# Altium PCB 前瞻传感器.PcbDoc
Units mil, origin at the board's own origin, x right, y up, seen from the top; angles counter-clockwise.
Board outline 3937.01 x 3937.01 mil, 4 copper layers (Top, GND, PWR, Bottom), stack 23.754 mil thick; 19 components, 34 nets, 122 pads, 48 vias.
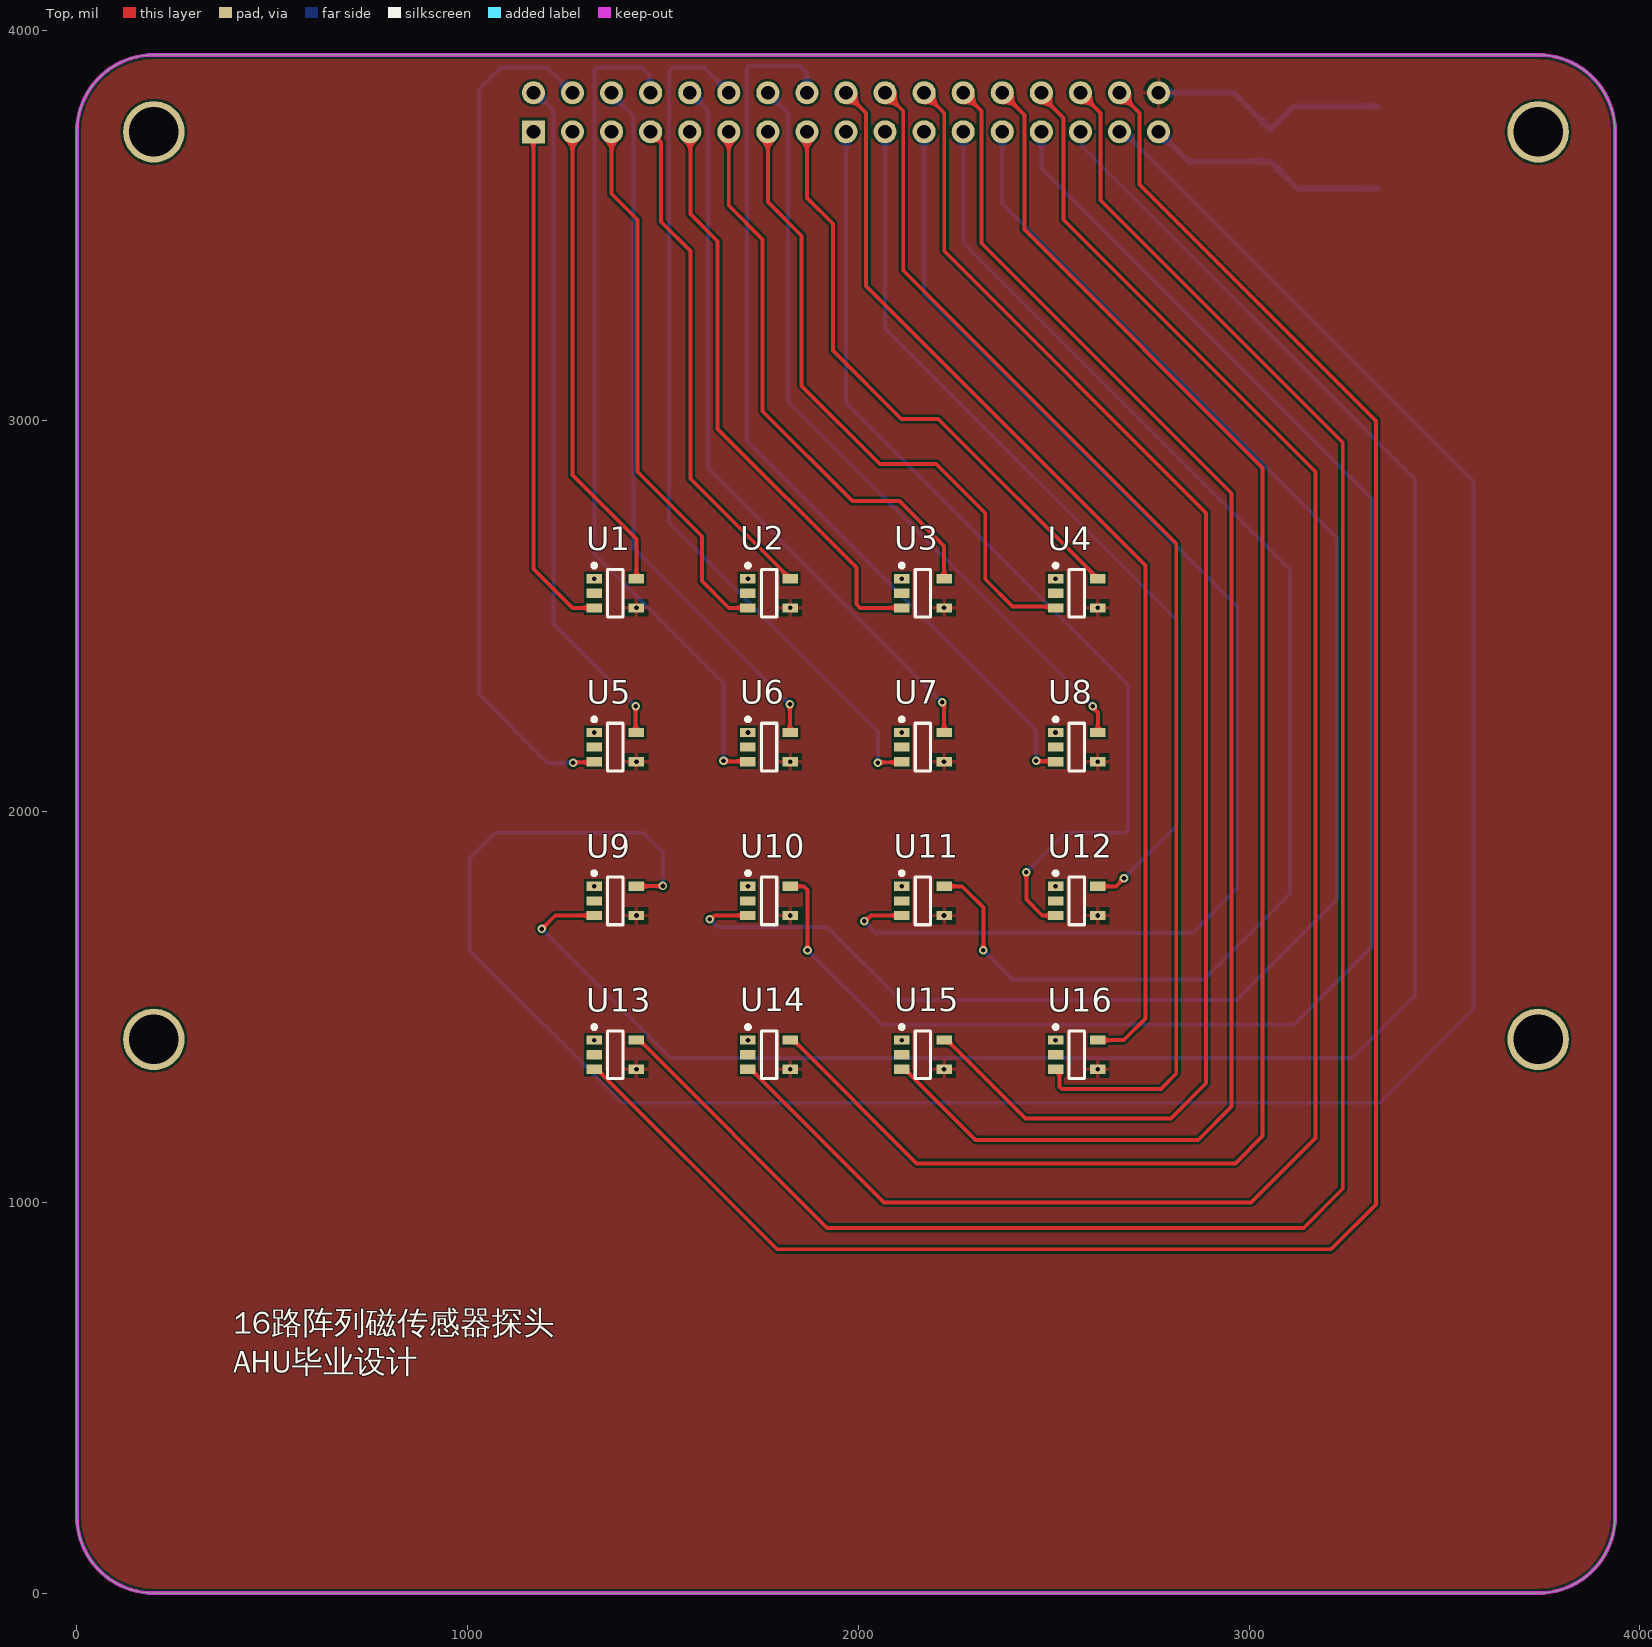
[diagram p0: Top view]
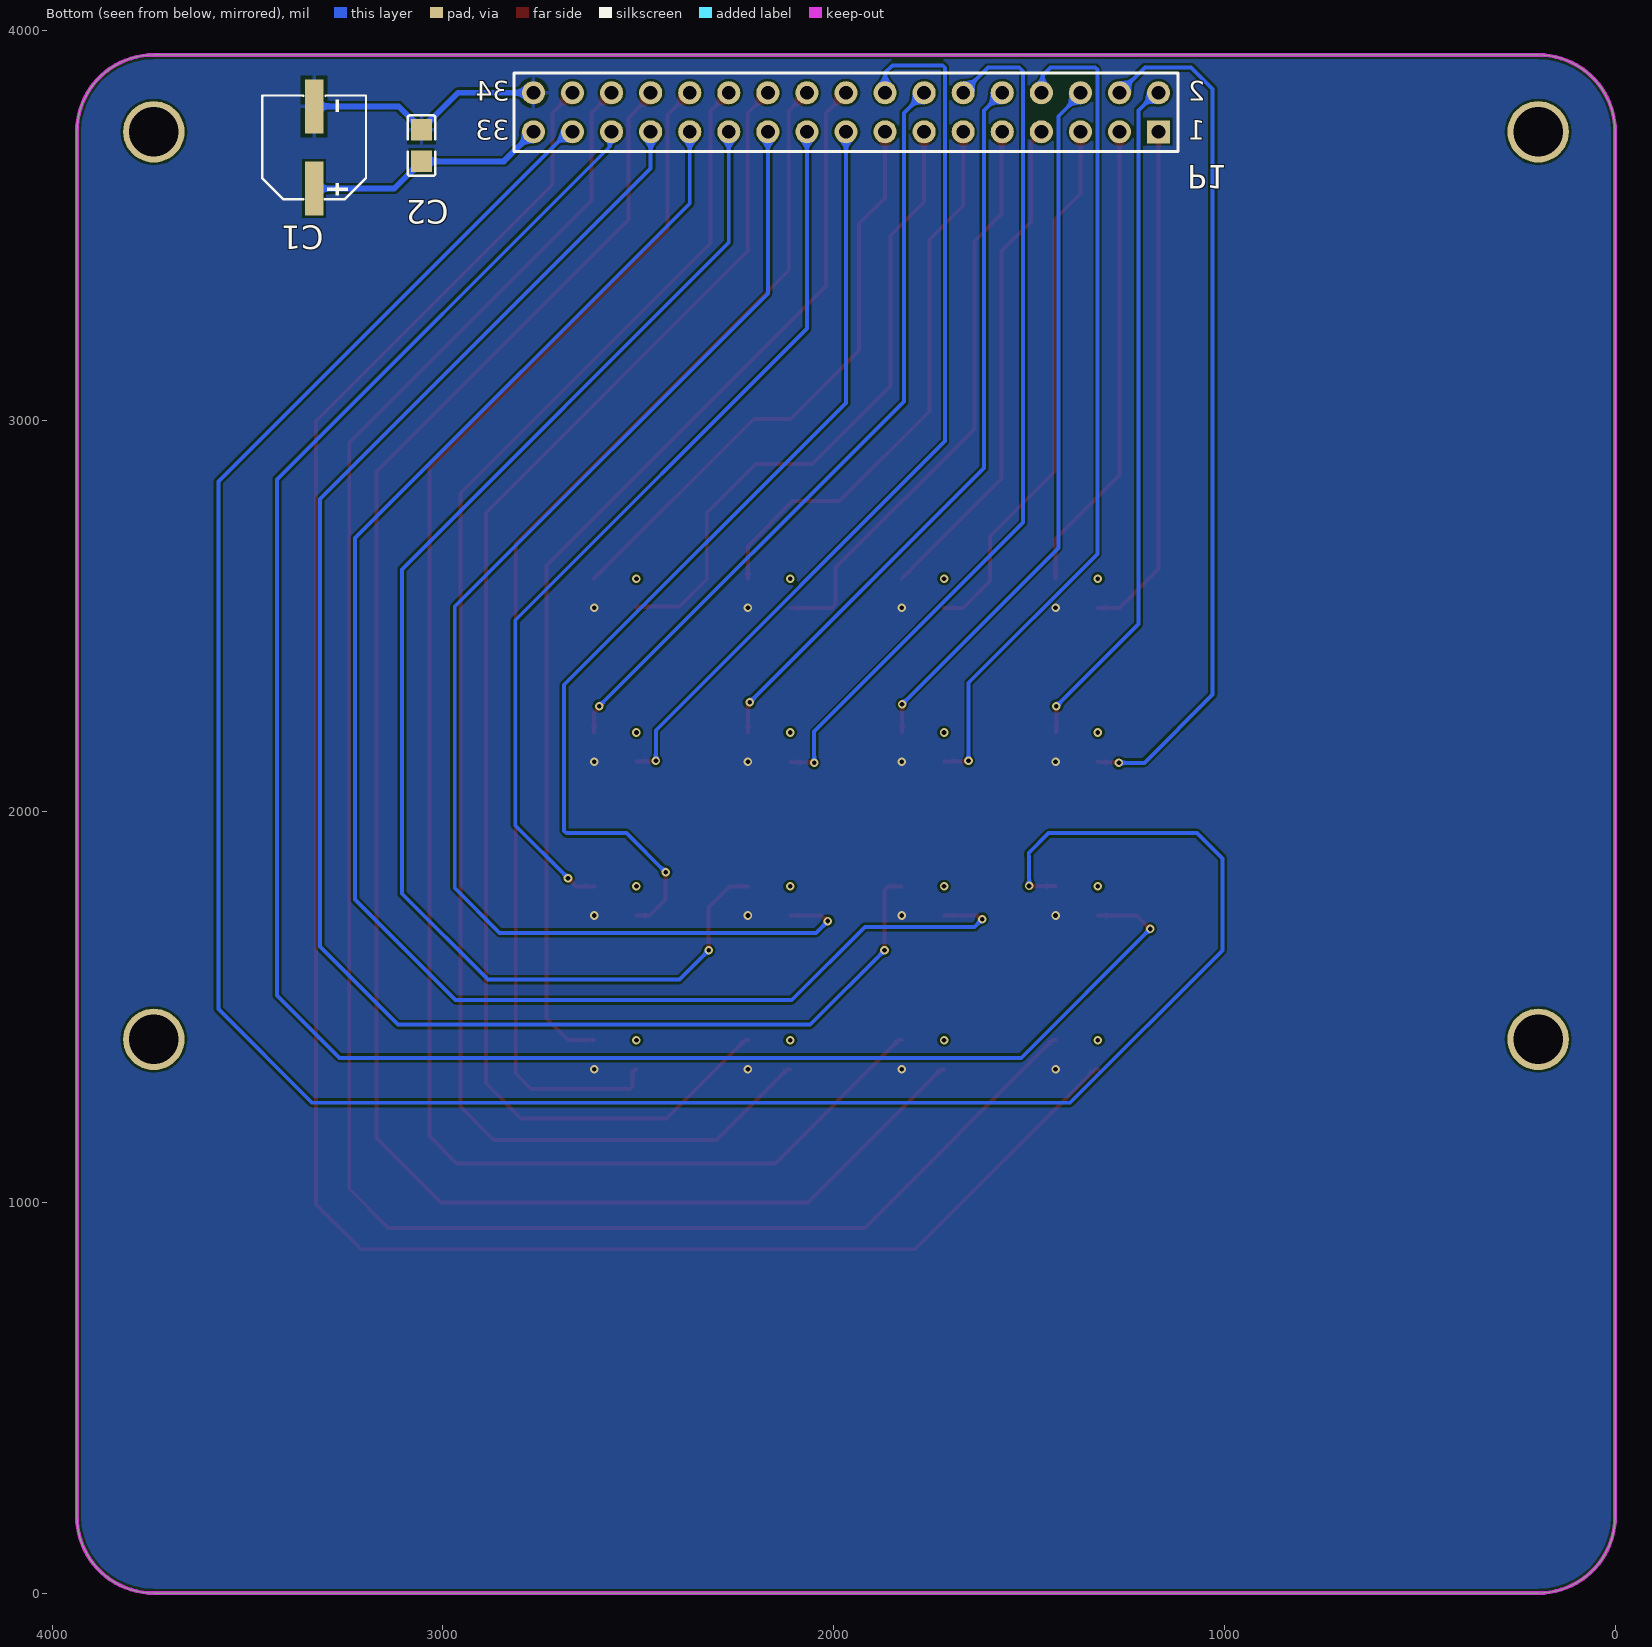
[diagram p1: Bottom view, seen from below]
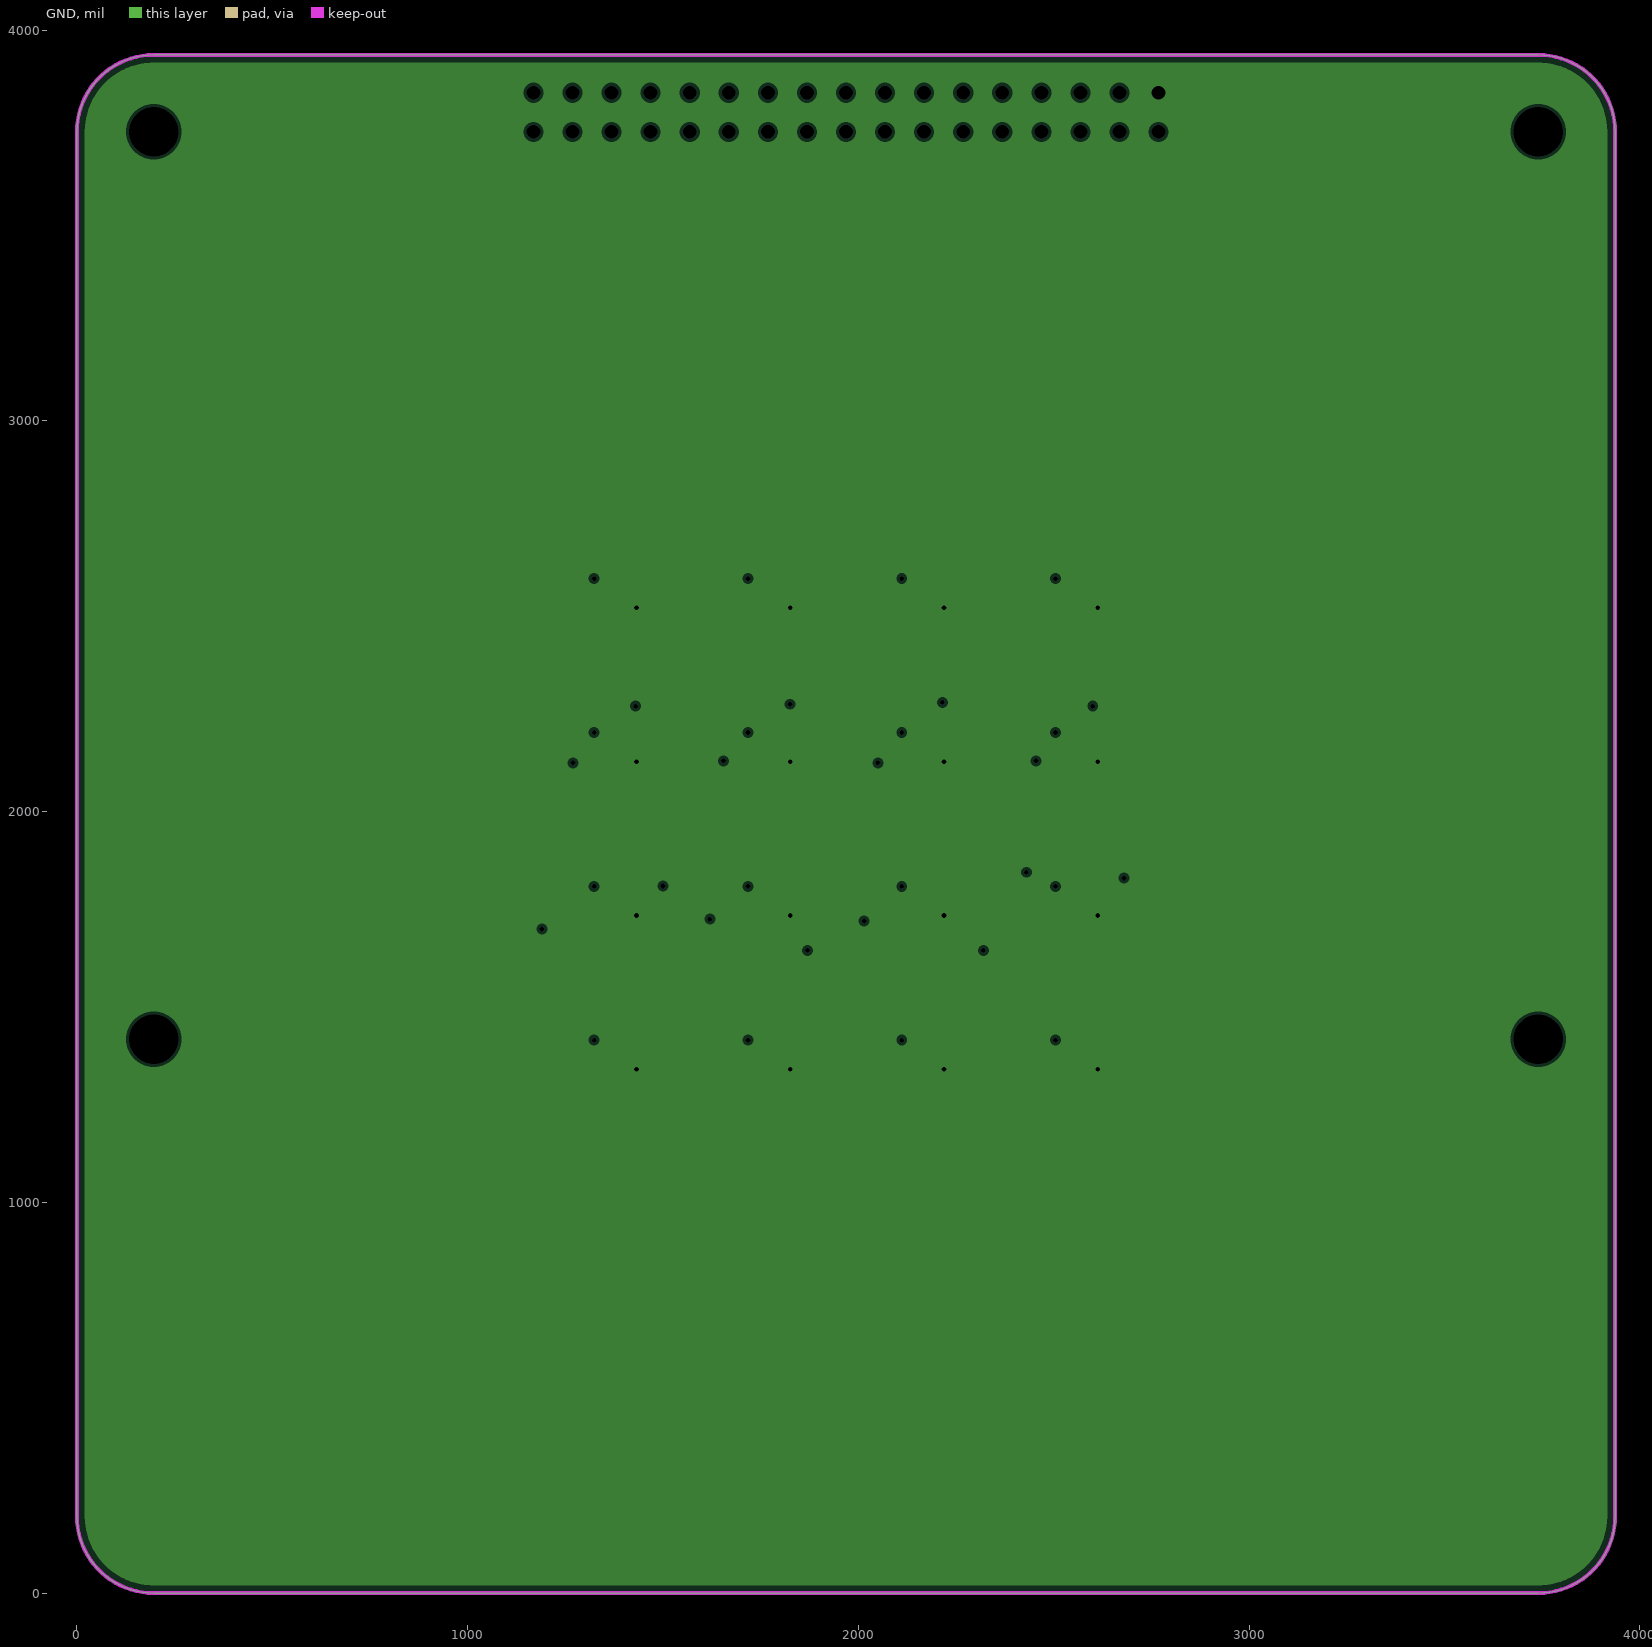
[diagram p2: GND, clearances drawn from the general rule]
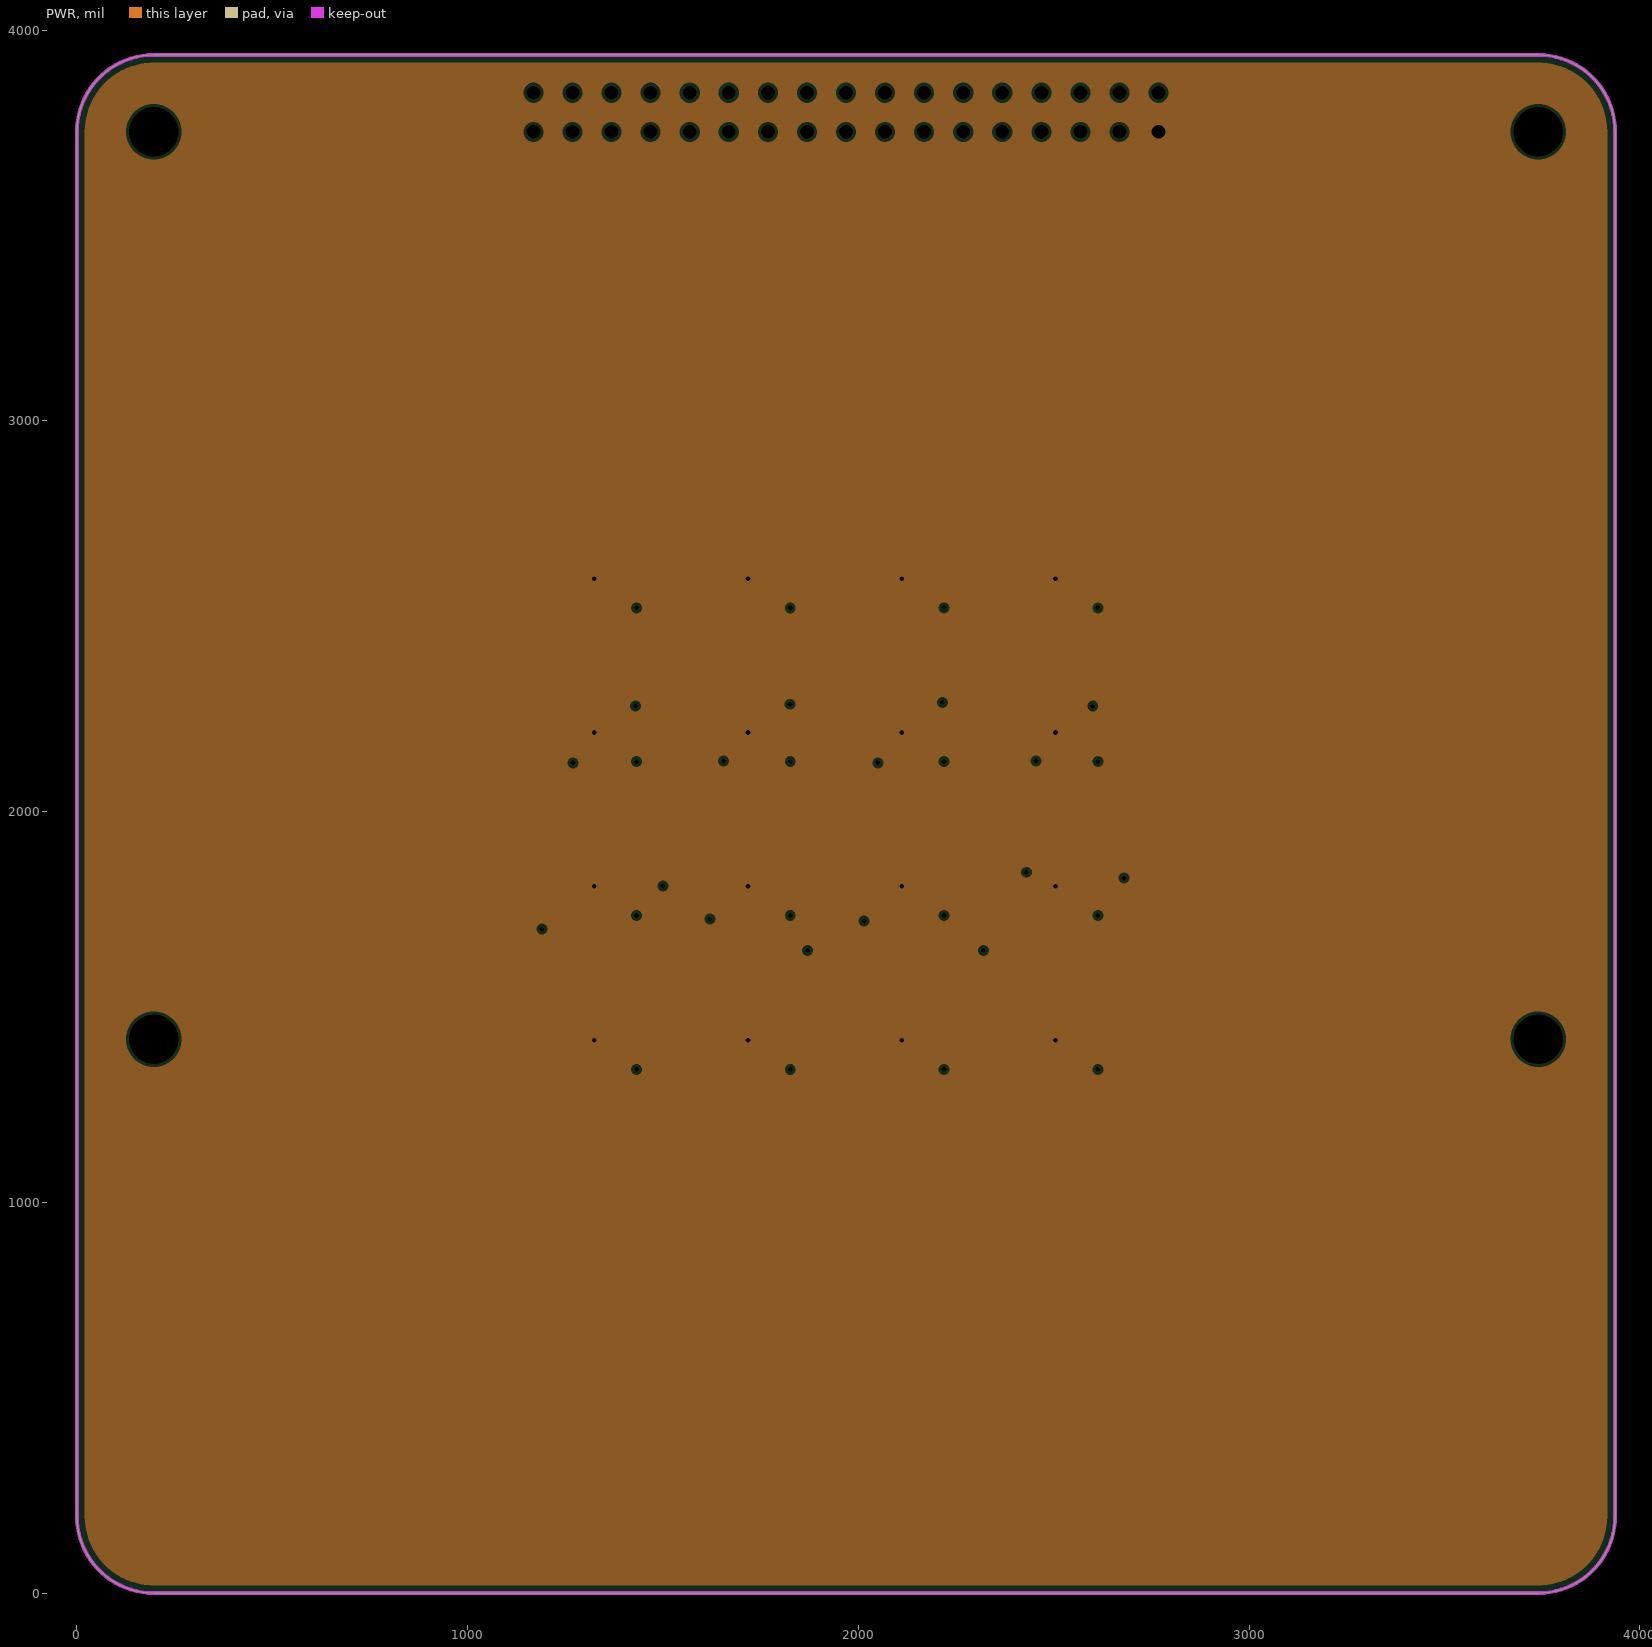
[diagram p3: PWR, clearances drawn from the general rule]
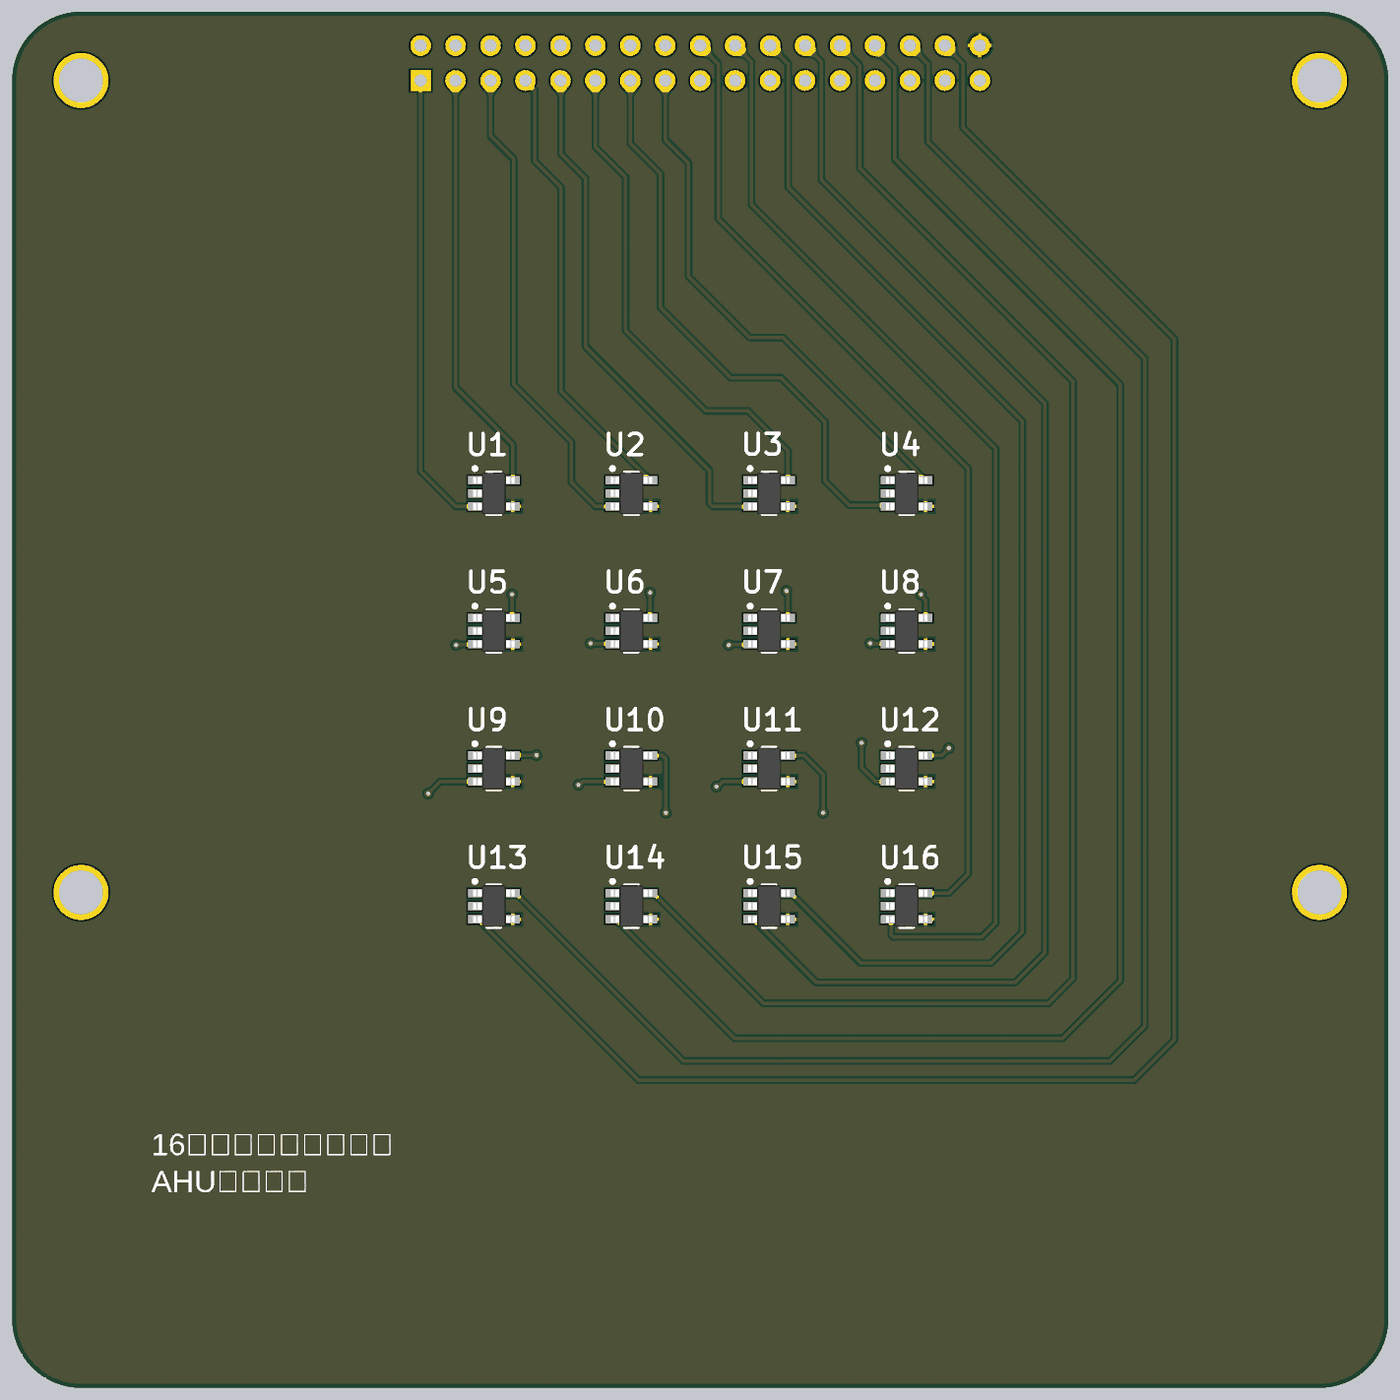
[diagram p4: 3D render of the assembled board from above, using the file's embedded part models]

## Layer stack, top to bottom
Top Solder: solder mask 0.4, Solder Resist, Dk 3.5
Top: signal copper 1.4
Dielectric 2: prepreg 2.8, PP-006, Dk 4.1
GND: plane copper 1.378, net GND
Dielectric 1: dielectric 12.5984, FR-4, Dk 4.8
PWR: plane copper 1.378, net VCC
Dielectric 3: prepreg 2.8, PP-006, Dk 4.1
Bottom: signal copper 1.4
Bottom Solder: solder mask 0.4, Solder Resist, Dk 3.5

## Board outline
196.85,0 cw(c196.85,196.85) 0,196.85 0,3740.16 cw(c196.85,3740.16) 196.85,3937.01 3740.16,3937.01 cw(c3740.16,3740.16) 3937.01,3740.16 3937.01,196.85 cw(c3740.16,196.85) 3740.16,0

## Design rules (kind name [scope] priority, off if disabled: settings)
Clearance [All] p1: gap=6 ignorepadtopadclearanceinfootprint=FALSE
HoleSize [All] p1: absolutevalues=TRUE maxlimit=130 minlimit=1 maxpercent=80.000 minpercent=20.000
MinimumSolderMaskSliver [All] p1: minsoldermaskwidth=2
PlaneClearance [All] p1: clearance=8
PlaneConnect [All] p1: planeconnectstyle=Direct reliefexpansion=20 reliefentries=4 reliefconductorwidth=10 reliefairgap=10
PolygonConnect [All] p1: thpad.connectstyle=Relief thpad.reliefconductorwidth=10 thpad.reliefentries=4 thpad.polygonreliefangle="90 Angle" thpad.airgapwidth=10 smdpad.connectstyle=Relief smdpad.reliefconductorwidth=10 smdpad.reliefentries=4 smdpad.polygonreliefangle="90 Angle" smdpad.airgapwidth=10 via.connectstyle=Direct via.reliefconductorwidth=10 via.reliefentries=4 via.polygonreliefangle="90 Angle" via.airgapwidth=10
RoutingVias [All] p1: holewidth=12 width=22 viastyle="Through Hole" minholewidth=12 minwidth=22 maxholewidth=12 maxwidth=22
SilkToSilkClearance [All] p1: silktosilkclearance=2
SilkToSolderMaskClearance [All] p1: minsilkscreentomaskgap=0 clearancetoexposedcopper=TRUE
SolderMaskExpansion [All] p1: expansion=4 istentingtop=FALSE
Width Width_1 [InNetClass('PWR')] p1: maxlimit=60 minlimit=10 preferedwidth=15
Width [All] p2: maxlimit=10 minlimit=10 preferedwidth=10
24 further rules are at their usual default settings.

## Classes and differential pairs
net class PWR: GND VCC

## Components (designator, comment, footprint, x,y, rotation, side; value= is the part's Value field where it differs from the comment)
C1 "47uF" CAP-SMD_BD6.3-L6.6-W6.6-LS7.2-FD 3330,3700 r90 bottom
C2 "0.1uF" 0805C 3055,3705 r270 bottom
P1 "Header 17X2H" HDR2X17 1168.5,3740.16 r0 bottom
U1 "TMR2001" SOT95P280X145-5N 1377.95,2559.06 r0 top
U2 "TMR2001" SOT95P280X145-5N 1771.65,2559.06 r0 top
U3 "TMR2001" SOT95P280X145-5N 2165.35,2559.06 r0 top
U4 "TMR2001" SOT95P280X145-5N 2559.06,2559.06 r0 top
U5 "TMR2001" SOT95P280X145-5N 1377.95,2165.35 r0 top
U6 "TMR2001" SOT95P280X145-5N 1771.65,2165.35 r0 top
U7 "TMR2001" SOT95P280X145-5N 2165.35,2165.35 r0 top
U8 "TMR2001" SOT95P280X145-5N 2559.06,2165.35 r0 top
U9 "TMR2001" SOT95P280X145-5N 1377.95,1771.65 r0 top
U10 "TMR2001" SOT95P280X145-5N 1771.65,1771.65 r0 top
U11 "TMR2001" SOT95P280X145-5N 2165.35,1771.65 r0 top
U12 "TMR2001" SOT95P280X145-5N 2559.06,1771.65 r0 top
U13 "TMR2001" SOT95P280X145-5N 1377.95,1377.95 r0 top
U14 "TMR2001" SOT95P280X145-5N 1771.65,1377.95 r0 top
U15 "TMR2001" SOT95P280X145-5N 2165.35,1377.95 r0 top
U16 "TMR2001" SOT95P280X145-5N 2559.06,1377.95 r0 top

## Footprints (in the part's own frame and the unit in brackets; to place one, negate y for a bottom-side part, rotate by r counter-clockwise, add the part's x,y. Pads: shape width x height; smd on the part's side, far side on the other; paste and mask are expansions set on the pad)
0805C [mm]
  rect 1.41x1.35 smd: 1(-1.03,0) 2(1.03,0)
  silkscreen extent -1.96,-0.9 1.96,0.9, body extent -1,-0.62 1,0.63, height 0.6
CAP-SMD_BD6.3-L6.6-W6.6-LS7.2-FD [mm]
  rect 3.5x1.2 smd: 1(-2.67,0) 2(2.67,0)
  silkscreen extent -3.38,-3.38 3.38,3.38, body extent -3.53,-3.38 3.47,3.22, height 5.4
HDR2X17 [mm] "Connector; Header; 17x2 Position"
  rect 1.5x1.5 hole 0.9: 1(0,0)
  round 1.5 hole 0.9: 2(0,-2.54) 3(2.54,0) 4(2.54,-2.54) 5(5.08,0) 6(5.08,-2.54) 7(7.62,0) 8(7.62,-2.54) 9(10.16,0) 10(10.16,-2.54) 11(12.7,0) 12(12.7,-2.54) 13(15.24,0) 14(15.24,-2.54) 15(17.78,0) 16(17.78,-2.54) 17(20.32,0) 18(20.32,-2.54) 19(22.86,0) 20(22.86,-2.54) 21(25.4,0) 22(25.4,-2.54) 23(27.94,0) 24(27.94,-2.54) 25(30.48,0) 26(30.48,-2.54) 27(33.02,0) 28(33.02,-2.54) 29(35.56,0) 30(35.56,-2.54) 31(38.1,0) 32(38.1,-2.54) 33(40.64,0) 34(40.64,-2.54)
  silkscreen extent -1.27,-3.81 41.91,1.27
SOT95P280X145-5N [mm] "SOT23, 5-Leads, Body 2.95x2.80mm, Pitch 0.95mm, IPC Medium Density"
  rect 1x0.6 smd: 1(-1.375,0.95) 2(-1.375,0) 3(-1.375,-0.95) 4(1.375,-0.95) 5(1.375,0.95)
  silkscreen extent -1.5,-1.55 0.5,1.92, body extent -1.5,-1.53 1.5,1.53, height 1.45

## Part data
C1: library part 10uF, "极性电解电容", BOM_JLCPCB Part Class="Extended Part", BOM_Manufacturer=ValuePro, BOM_Manufacturer Part="Non - polar electrolytic capacitors10uf 100v", BOM_Supplier=LCSC, BOM_Supplier Part=C56706, nameAlias=Capacitance, spicePre=C, spiceSymbolName="Non - polar electrolytic capacitors10uf 100v"
C2: library part CAP, "普通电容"
P1: "Header, 17-Pin, Dual row, Right Angle", LatestRevisionDate=17-Jul-2002, LatestRevisionNote="Re-released for DXP Platform.", Publisher="Altium Limited"
U1 U2 U3 U4 U5 U6 U7 U8 U9 U10 U11 U12 U13 U14 U15 U16: "线性磁传感器"

## Free pads (board coordinates)
  round 157.48 hole 125.98: 0(196.85,1417.32) 0(196.85,3740.16) 0(3740.16,1417.32) 0(3740.16,3740.16)

## Via types
v1: diameter 22, hole 12, Top to Bottom, tented both sides, 48 vias

## Nets (pads, with @x,y where several pads share a name; then routed paths per layer and width w, separated by ;. In a path a pad name is that pad's centre, name@x,y a point inside that pad or via, vN(x,y) a via of type N, cw(c..) or ccw(c..) an arc to the next point about the centre after c; other vN are vias at no path point)
GND: C1.2 C2.1 P1.34 U1.4 U2.4 U3.4 U4.4 U5.4 U6.4 U7.4 U8.4 U9.4 U10.4 U11.4 U12.4 U13.4 U14.4 U15.4 U16.4 | length 625.6
  Bottom w15: P1.34 2961.57,3840.16 C2.1@3055,3746.73 ; C2.1 C2.1@3055,3746.73 ; C1.2 3113.39,3805.12 C2.1@3055,3746.73
  other v1: 1432.09,1340.55 1825.79,1340.55 2219.49,1340.55 2613.19,1340.55 1432.09,1734.25 1825.79,1734.25 2219.49,1734.25 2613.19,1734.25 1432.09,2127.95 1825.79,2127.95 2219.49,2127.95 2613.19,2127.95 1432.09,2521.65 1825.79,2521.65 2219.49,2521.65 2613.19,2521.65
IN+1: P1.1 U1.3 | length 1315.3
  Top w10: P1.1 1168.5,2621.5 1268.35,2521.65 U1.3
IN+2: P1.5 U2.3 | length 1391.9
  Top w10: P1.5 1368.5,3581.5 1435,3515 1435,2870 1600,2705 1600,2590 1668.35,2521.65 U2.3
IN+3: P1.9 U3.3 | length 1506
  Top w10: P1.9 1570,3738.66 1570,3530 1640,3460 1640,2980 1995,2625 1995,2530.86 2004.2,2521.65 U3.3
IN+4: P1.13 U4.3 | length 1670.4
  Top w10: P1.13 1768.5,3560.65 1855,3474.15 1855,3090 2055,2890 2199.14,2890 2205,2884.14 2325,2764.14 2325,2595 2395,2525 2501.57,2525 U4.3
IN+5: P1.4 U5.3 | length 2205.7
  Top w10: v1(1270,2125) 1271.48,2126.48 1322.34,2126.48 U5.3
  Bottom w10: P1.4 1203.66,3905 1085,3905 1030,3850 1030,2300 1205,2125 v1(1270,2125)
IN+6: P1.8 U6.3 | length 2166.2
  Top w10: v1(1655,2130) 1656.02,2128.98 1716.5,2128.98 U6.3
  Bottom w10: P1.8 1465.31,3843.35 1465.31,3884.69 1445,3905 1330.86,3905 1325,3899.14 1325,2660 1655,2330 v1(1655,2130)
IN+7: P1.12 U7.3 | length 2239.3
  Top w10: v1(2050,2125) 2051.48,2126.48 2109.74,2126.48 U7.3
  Bottom w10: P1.12 1668.5,3841.5 1605,3905 1525,3905 1515,3895 1515,2740 2050,2205 v1(2050,2125)
IN+8: P1.16 U8.3 | length 2346.4
  Top w10: v1(2455,2130) 2456.02,2128.98 2503.9,2128.98 U8.3
  Bottom w10: P1.16 1868.5,3891.5 1850,3910 1720.86,3910 1715,3904.14 1715,2948.39 2455,2208.39 v1(2455,2130)
IN+9: P1.29 U9.3 | length 5150.9
  Top w10: v1(1190,1700) 1224.25,1734.25 U9.3
  Bottom w10: v1(1190,1700) 1520,1370 3265,1370 3425,1530 3425,2850 2573.16,3701.84 2573.16,3735.5 P1.29
IN+10: P1.25 U10.3 | length 4218.8
  Top w10: v1(1620,1725) 1623.25,1725 1632.5,1734.25 U10.3
  Bottom w10: v1(1620,1725) 1640,1705 1920,1705 2107.38,1517.62 2967.62,1517.62 3225,1775 3225,2700 2368.5,3556.5 P1.25
IN+11: P1.21 U11.3 | length 3384.3
  Top w10: v1(2015,1720) 2018.25,1720 2032.5,1734.25 U11.3
  Bottom w10: v1(2015,1720) 2045,1690 2855,1690 2970,1805 2970,2525 2168.5,3326.5 P1.21
IN+12: P1.17 U12.3 | length 2553.8
  Top w10: v1(2430,1845) 2430,1775 2470.75,1734.25 U12.3
  Bottom w10: P1.17 1968.5,3046.5 2690,2325 2690,1950.86 2684.14,1945 2530,1945 v1(2430,1845)
IN+13: P1.32 U13.3 | length 5356.7
  Top w10: U13.3 1331.69,1340.55 1792.24,880 3210,880 3325,995 3325,3000 2720,3605 2720,3788.66 P1.32
IN+14: P1.28 U14.3 | length 4627.6
  Top w10: U14.3 1725.39,1340.55 2065.95,1000 3005,1000 3170,1165 3170,2870 2525,3515 2525,3775 2468.5,3831.5 P1.28
IN+15: P1.24 U15.3 | length 3833.3
  Top w10: U15.3 2119.09,1340.55 2299.65,1160 2870,1160 2955,1245 2955,2815 2315,3455 2315,3793.66 P1.24
IN+16: P1.20 U16.3 | length 3187.7
  Top w10: P1.20 2115,3793.66 2115,3385 2813.76,2686.24 2813.76,1329.54 2774.22,1290 2520.86,1290 2515,1295.86 2515,1333.74 2508.19,1340.55 U16.3
IN-1: P1.3 U1.5 | length 1211.5
  Top w10: P1.3 1268.5,2861.5 1432.09,2697.91 U1.5
IN-2: P1.7 U2.5 | length 1291.7
  Top w10: P1.7 1468.5,3738.46 1495,3711.97 1495,3510 1570,3435 1570,2852.24 U2.5
IN-3: P1.11 U3.5 | length 1442.2
  Top w10: P1.11 1668.5,3551.02 1755,3464.53 1755,3025 1985,2795 2105,2795 2219.49,2680.51 U3.5
IN-4: P1.15 U4.5 | length 1507.6
  Top w10: P1.15 1868.5,3571.21 1935,3504.72 1935,3180 2110,3005 2204.65,3005 U4.5
IN-5: P1.2 U5.5 | length 1750.3
  Top w10: v1(1430,2270) 1430,2204.84 U5.5
  Bottom w10: P1.2 1174.84,3840.16 1220,3795 1220,2480 v1(1430,2270)
IN-6: P1.6 U6.5 | length 1819.7
  Top w10: v1(1825,2275) 1825,2203.54 U6.5
  Bottom w10: P1.6 1368.5,3836.5 1425,3780 1425,2675 v1@1820,2280
IN-7: P1.10 U7.5 | length 1907.8
  Top w10: v1(2215,2280) 2215,2276.75 2219.49,2272.26 U7.5
  Bottom w10: P1.10 1569.84,3840.16 1615,3795 1615,2880 v1(2215,2280)
IN-8: P1.14 U8.5 | length 1987.3
  Top w10: v1(2600,2270) 2600,2266.75 2613.19,2253.56 U8.5
  Bottom w10: P1.14 1820,3788.66 1820,3050 v1(2600,2270)
IN-9: P1.31 U9.5 | length 6389.9
  Top w10: U9.5 1432.56,1809.53 1499.53,1809.53 v1(1500,1810)
  Bottom w10: v1(1500,1810) 1500,1885 1500.86,1885.86 1500.86,1894.14 1450,1945 1070,1945 1005,1880 1005,1645 1395,1255 3335,1255 3575,1495 3575,2845 2679.84,3740.16 P1.31
IN-10: P1.27 U10.5 | length 4245.3
  Top w10: U10.5 1860.94,1809.06 1870,1800 v1(1870,1645)
  Bottom w10: v1(1870,1645) 2060,1455 3115,1455 3315,1655 3315,2800 2468.5,3646.5 P1.27
IN-11: P1.23 U11.5 | length 3436.7
  Top w10: U11.5 2265.94,1809.06 2320,1755 v1(2320,1645)
  Bottom w10: P1.23 2268.5,3456.5 3105,2620 3105,1790 2885,1570 2395,1570 v1(2320,1645)
IN-12: P1.19 U12.5 | length 2350.8
  Top w10: U12.5 2659.06,1809.06 v1(2680,1830)
  Bottom w10: P1.19 2068.5,3236.5 2815,2490 2815,1965 v1(2680,1830)
IN-13: P1.30 U13.5 | length 5131.6
  Top w10: U13.5 1439.96,1415.35 1920.32,935 3140,935 3240,1035 3240,2945 2620,3565 2620,3788.66 P1.30
IN-14: P1.26 U14.5 | length 4315.1
  Top w10: U14.5 1833.66,1415.35 2149.02,1100 2965,1100 3035,1170 3035,2880 2425,3490 2425,3783.66 P1.26
IN-15: P1.22 U15.5 | length 3624.8
  Top w10: P1.22 2220,3788.66 2220,3435 2890,2765 2890,1305 2800,1215 2427.72,1215 2227.36,1415.35 U15.5
IN-16: P1.18 U16.5 | length 2831.6
  Top w10: P1.18 2020,3788.66 2020,3345 2735,2630 2735,1470.86 2679.5,1415.35 U16.5
VCC: C1.1 C2.2 P1.33 U1.1 U2.1 U3.1 U4.1 U5.1 U6.1 U7.1 U8.1 U9.1 U10.1 U11.1 U12.1 U13.1 U14.1 U15.1 U16.1 | length 621.7
  Bottom w15: P1.33 2844.21,3664.45 C2.2 3124.57,3594.88 C1.1
  other v1: 1323.82,1415.35 1717.52,1415.35 2111.22,1415.35 2504.92,1415.35 1323.82,1809.06 1717.52,1809.06 2111.22,1809.06 2504.92,1809.06 1323.82,2202.76 1717.52,2202.76 2111.22,2202.76 2504.92,2202.76 1323.82,2596.46 1717.52,2596.46 2111.22,2596.46 2504.92,2596.46
pads on no net: U1.2 U2.2 U3.2 U4.2 U5.2 U6.2 U7.2 U8.2 U9.2 U10.2 U11.2 U12.2 U13.2 U14.2 U15.2 U16.2

## Polygon pours and split planes (outlines as drawn)
GND on Bottom "GND_L04_P001" (solid, remove dead copper, pour order 1): 0,0 3937.01,0 3937.01,3937.01 0,3937.01
GND on Top "GND_L01_P000" (solid, remove dead copper, pour order 0): 0,0 0,3937.01 3937.01,3937.01 3937.01,0
GND on GND (split plane): 3751.72,3916.62 3763.24,3915.49 3774.66,3913.6 3785.93,3910.98 3797,3907.62 3807.83,3903.54 3818.37,3898.77 3828.58,3893.31 3838.41,3887.2 3847.81,3880.46 3856.76,3873.12 3865.21,3865.21 3873.12,3856.76 3880.46,3847.81 3887.2,3838.41 3893.31,3828.58 3898.76,3818.37 3903.54,3807.83 3907.62,3797 3910.98,3785.93 3913.6,3774.66 3915.49,3763.24 3916.62,3751.72 3916.98,3740.85 3916.91,3740.16 3916.91,196.85 3916.98,196.15 3916.62,185.28 3915.49,173.77 3913.6,162.35 3910.98,151.08 3907.62,140.01 3903.54,129.17 3898.76,118.63 3893.31,108.43 3887.2,98.6 3880.46,89.19 3873.12,80.25 3865.21,71.8 3856.76,63.89 3847.81,56.55 3838.41,49.81 3828.58,43.7 3818.37,38.24 3807.83,33.47 3797,29.39 3785.93,26.03 3774.66,23.4 3763.24,21.52 3751.72,20.38 3740.85,20.03 3740.16,20.1 196.85,20.1 196.15,20.03 185.28,20.38 173.77,21.52 162.35,23.4 151.08,26.03 140.01,29.39 129.17,33.47 118.63,38.24 108.43,43.7 98.6,49.81 89.19,56.55 80.25,63.89 71.8,71.8 63.89,80.25 56.55,89.19 49.81,98.6 43.7,108.43 38.24,118.63 33.47,129.17 29.39,140.01 26.03,151.08 23.4,162.35 21.52,173.77 20.38,185.28 20.03,196.15 20.1,196.85 20.1,3740.16 20.03,3740.85 20.38,3751.72 21.52,3763.24 23.4,3774.66 26.03,3785.93 29.39,3797 33.47,3807.83 38.24,3818.37 43.7,3828.58 49.81,3838.41 56.55,3847.81 63.89,3856.76 71.8,3865.21 80.25,3873.12 89.19,3880.46 98.6,3887.2 108.43,3893.31 118.63,3898.77 129.17,3903.54 140.01,3907.62 151.08,3910.98 162.35,3913.6 173.77,3915.49 185.28,3916.62 196.15,3916.98 196.85,3916.91 3740.16,3916.91 3740.85,3916.98
VCC on PWR (split plane): 3751.72,3916.62 3763.24,3915.49 3774.66,3913.6 3785.93,3910.98 3797,3907.62 3807.83,3903.54 3818.37,3898.77 3828.58,3893.31 3838.41,3887.2 3847.81,3880.46 3856.76,3873.12 3865.21,3865.21 3873.12,3856.76 3880.46,3847.81 3887.2,3838.41 3893.31,3828.58 3898.76,3818.37 3903.54,3807.83 3907.62,3797 3910.98,3785.93 3913.6,3774.66 3915.49,3763.24 3916.62,3751.72 3916.98,3740.85 3916.91,3740.16 3916.91,196.85 3916.98,196.15 3916.62,185.28 3915.49,173.77 3913.6,162.35 3910.98,151.08 3907.62,140.01 3903.54,129.17 3898.76,118.63 3893.31,108.43 3887.2,98.6 3880.46,89.19 3873.12,80.25 3865.21,71.8 3856.76,63.89 3847.81,56.55 3838.41,49.81 3828.58,43.7 3818.37,38.24 3807.83,33.47 3797,29.39 3785.93,26.03 3774.66,23.4 3763.24,21.52 3751.72,20.38 3740.85,20.03 3740.16,20.1 196.85,20.1 196.15,20.03 185.28,20.38 173.77,21.52 162.35,23.4 151.08,26.03 140.01,29.39 129.17,33.47 118.63,38.24 108.43,43.7 98.6,49.81 89.19,56.55 80.25,63.89 71.8,71.8 63.89,80.25 56.55,89.19 49.81,98.6 43.7,108.43 38.24,118.63 33.47,129.17 29.39,140.01 26.03,151.08 23.4,162.35 21.52,173.77 20.38,185.28 20.03,196.15 20.1,196.85 20.1,3740.16 20.03,3740.85 20.38,3751.72 21.52,3763.24 23.4,3774.66 26.03,3785.93 29.39,3797 33.47,3807.83 38.24,3818.37 43.7,3828.58 49.81,3838.41 56.55,3847.81 63.89,3856.76 71.8,3865.21 80.25,3873.12 89.19,3880.46 98.6,3887.2 108.43,3893.31 118.63,3898.77 129.17,3903.54 140.01,3907.62 151.08,3910.98 162.35,3913.6 173.77,3915.49 185.28,3916.62 196.15,3916.98 196.85,3916.91 3740.16,3916.91 3740.85,3916.98

## Keep-outs
Keep-Out Layer:
  the board outline again, w10

## Silkscreen, mask and mechanical layers (free items; w line width, h text height)
Top Overlay:
  text "16路阵列磁传感器探头 / AHU毕业设计" at 400,545 h100

## Text inside footprints (layer, text, board x,y; h text height)
P1: Bottom Overlay "2" at 1048.5,3820.16 h50; Bottom Overlay "1" at 1048.5,3720.16 h50; Bottom Overlay "33" at 2828.5,3720.16 h50; Bottom Overlay "34" at 2828.5,3820.16 h50